# Altium PCB shield.PcbDoc
Units mm, origin at the board's own origin, x right, y up, seen from the top; angles counter-clockwise.
Board outline 86.11 x 99.08 mm, 4 copper layers (Top, AGND, POWER, Bottom), stack 0.699 mm thick; 35 components, 39 nets, 183 pads, 7 vias.
Unrouted connection lines stored in the file: 2.
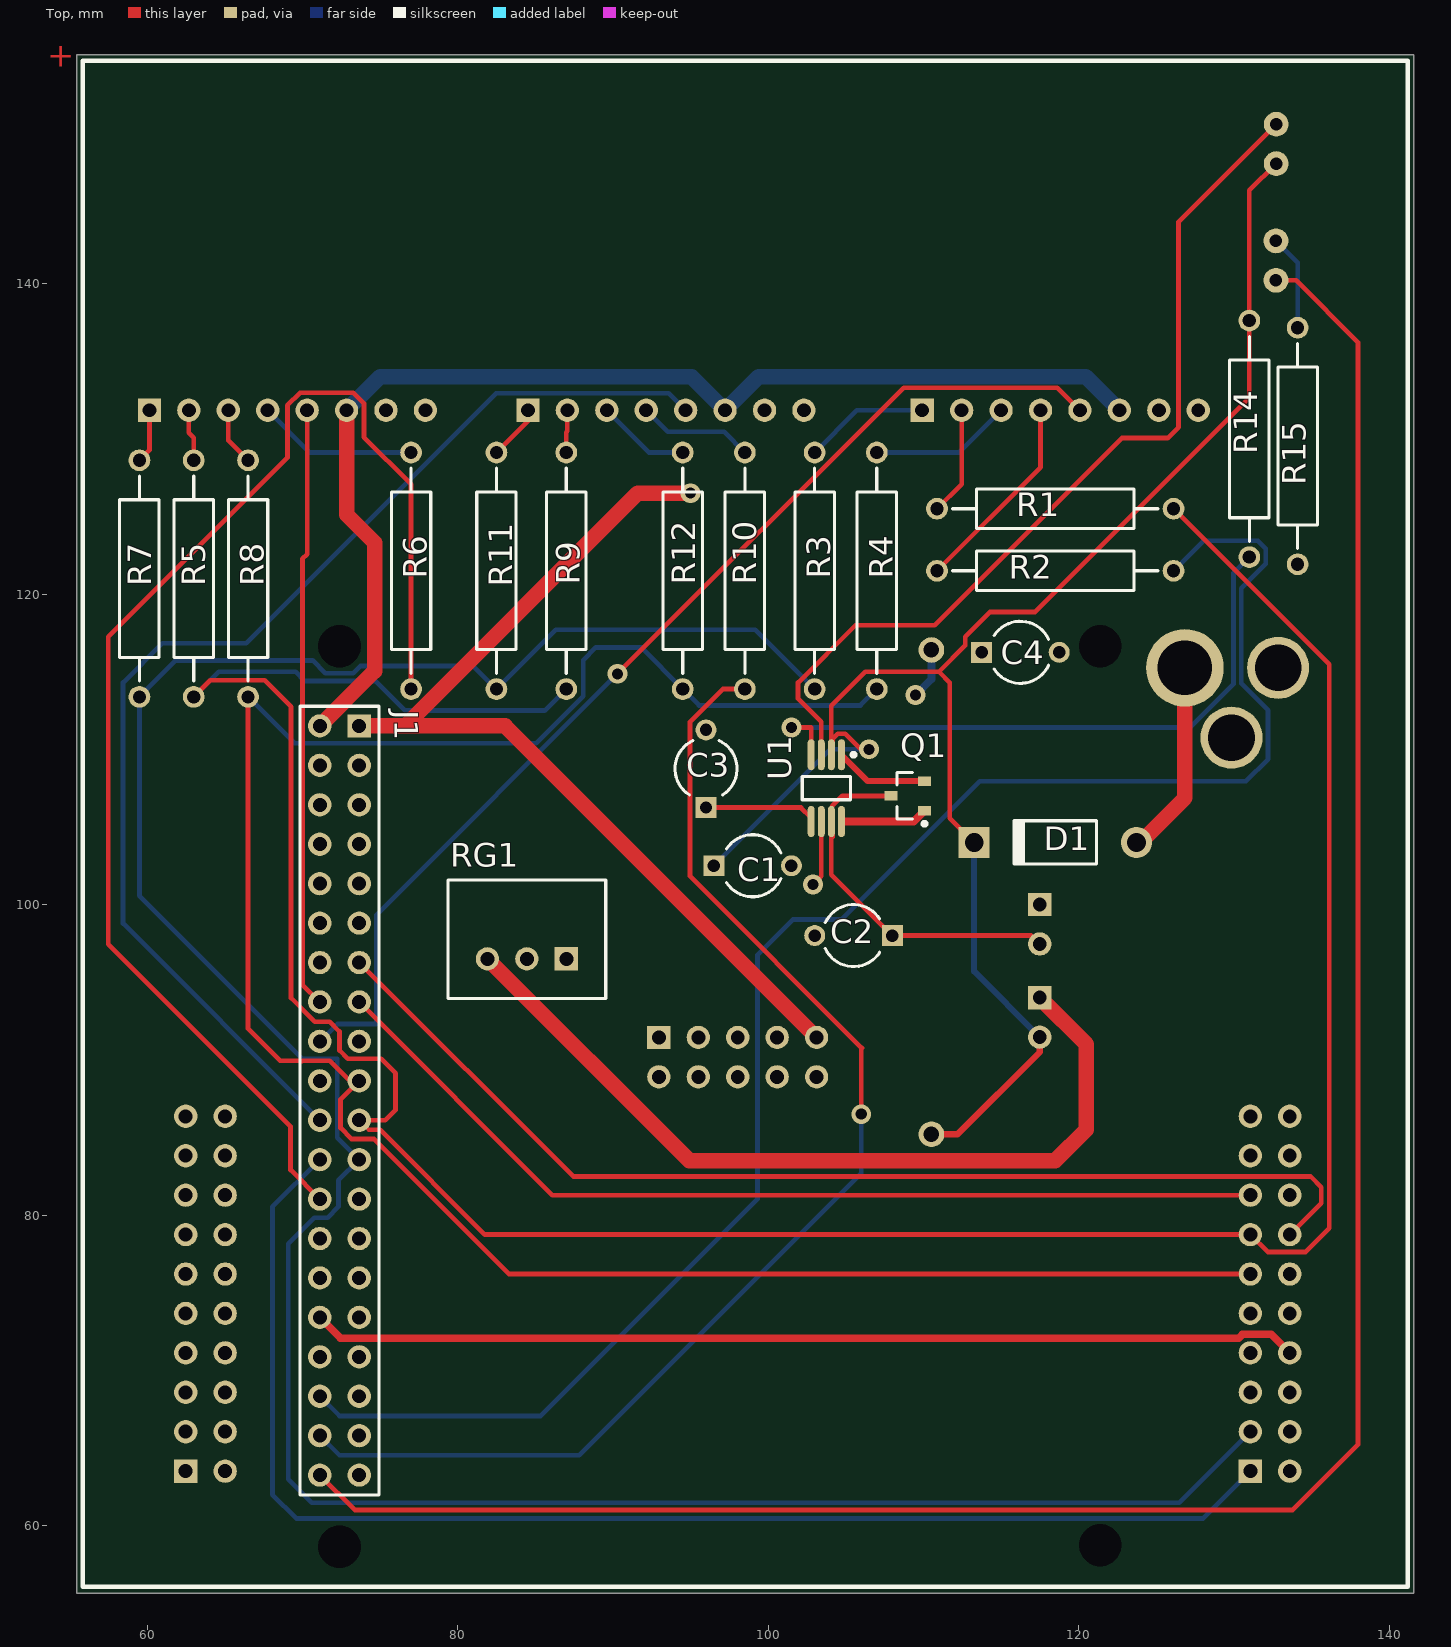
[diagram p0: Top view]
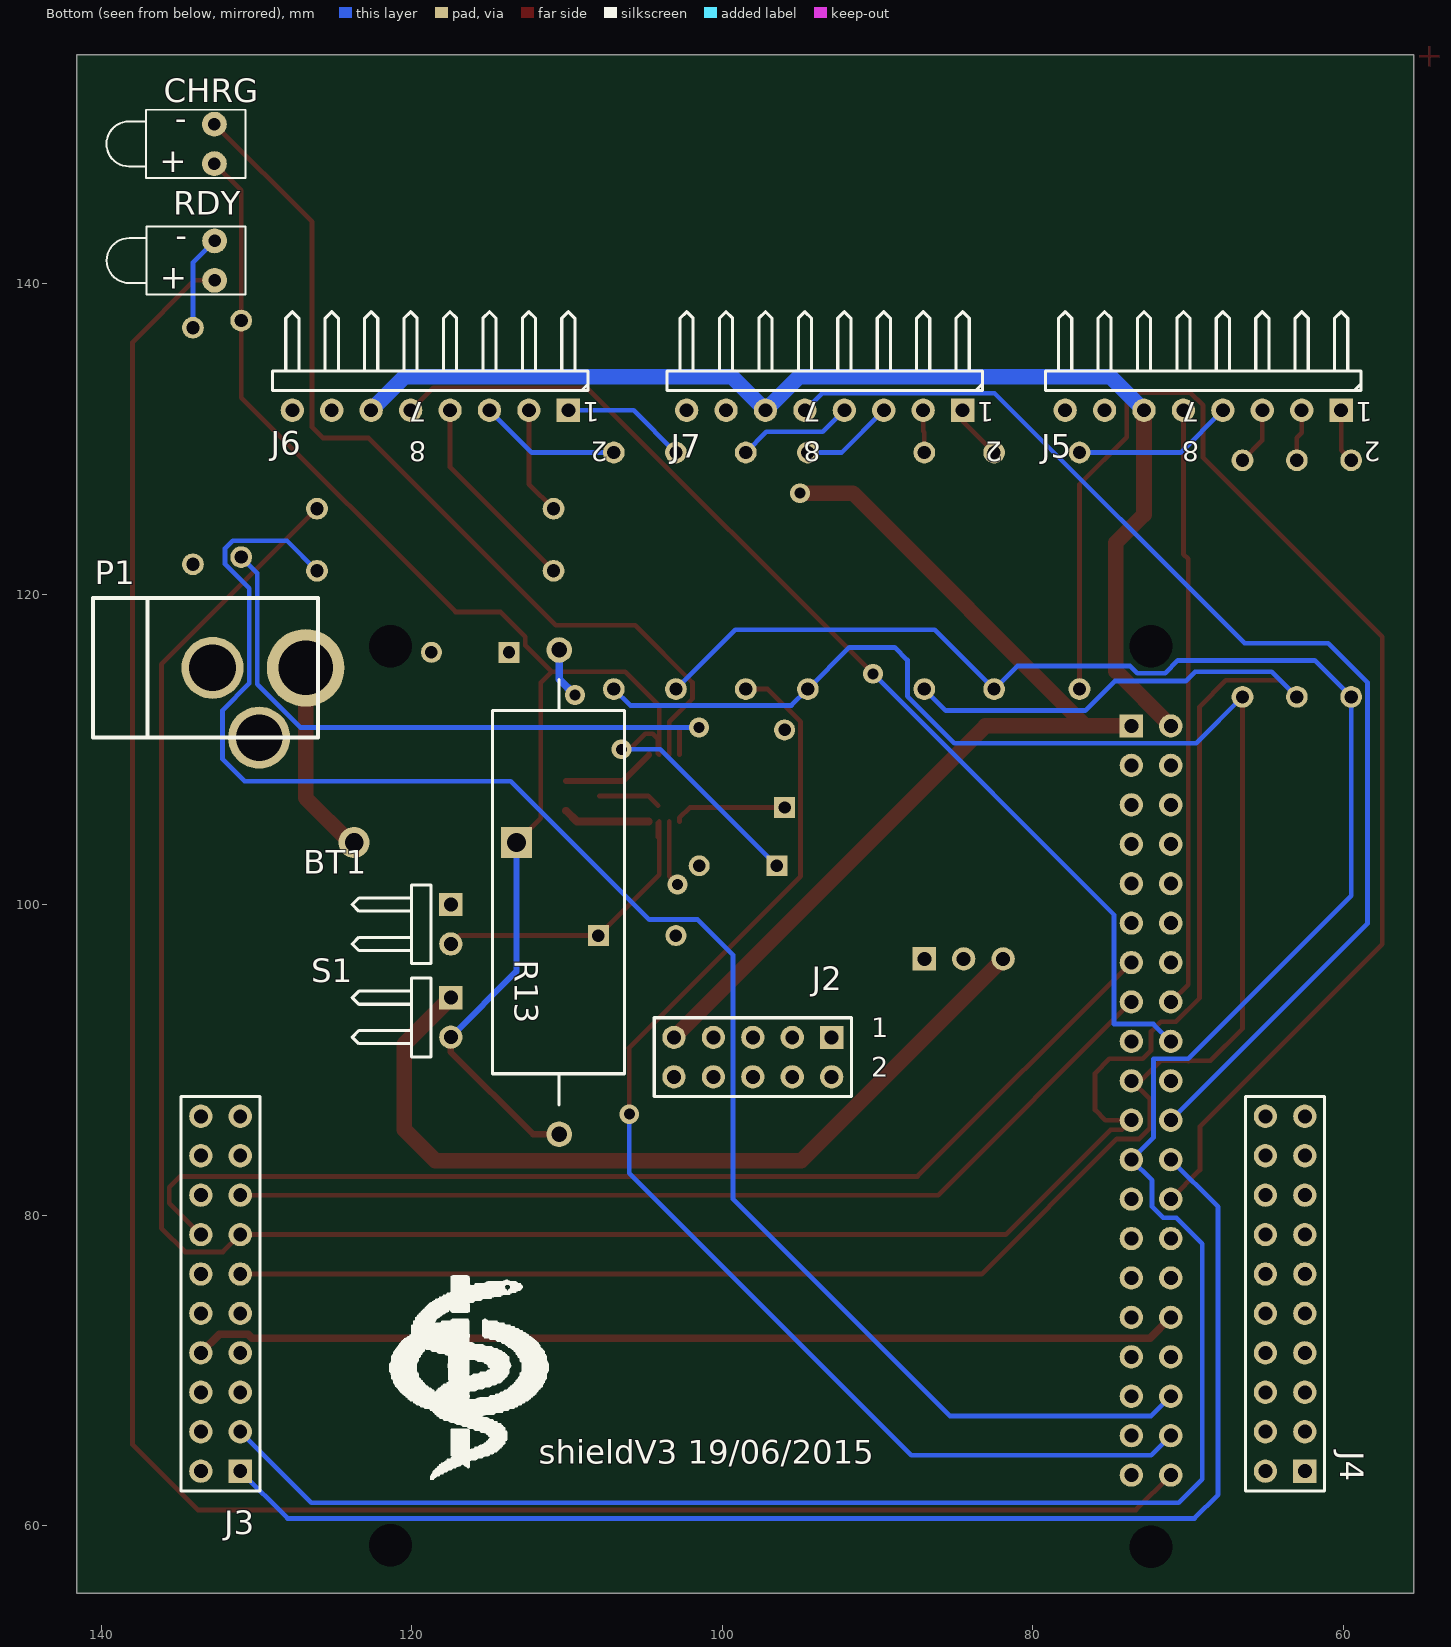
[diagram p1: Bottom view, seen from below]
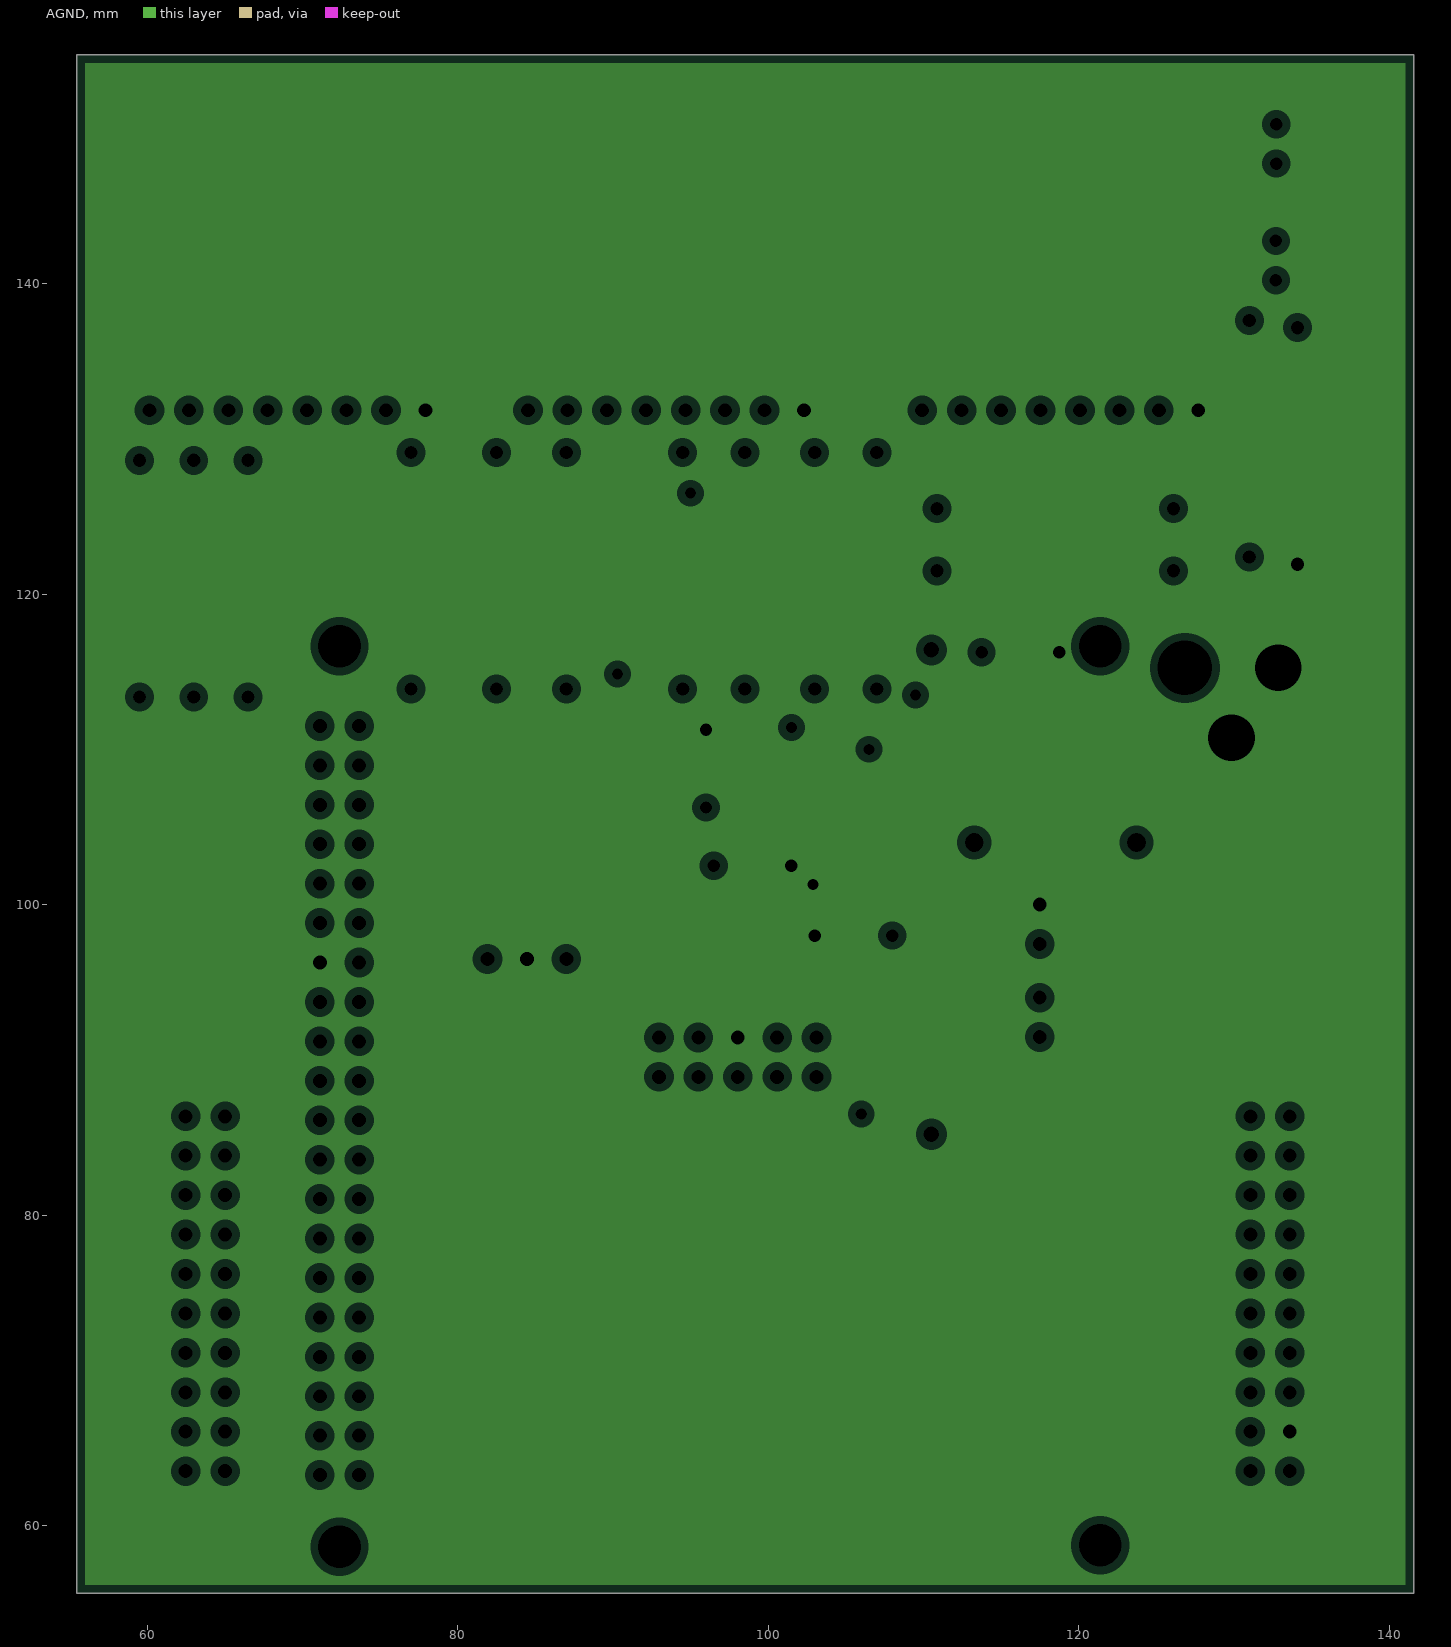
[diagram p2: AGND, clearances drawn from the general rule]
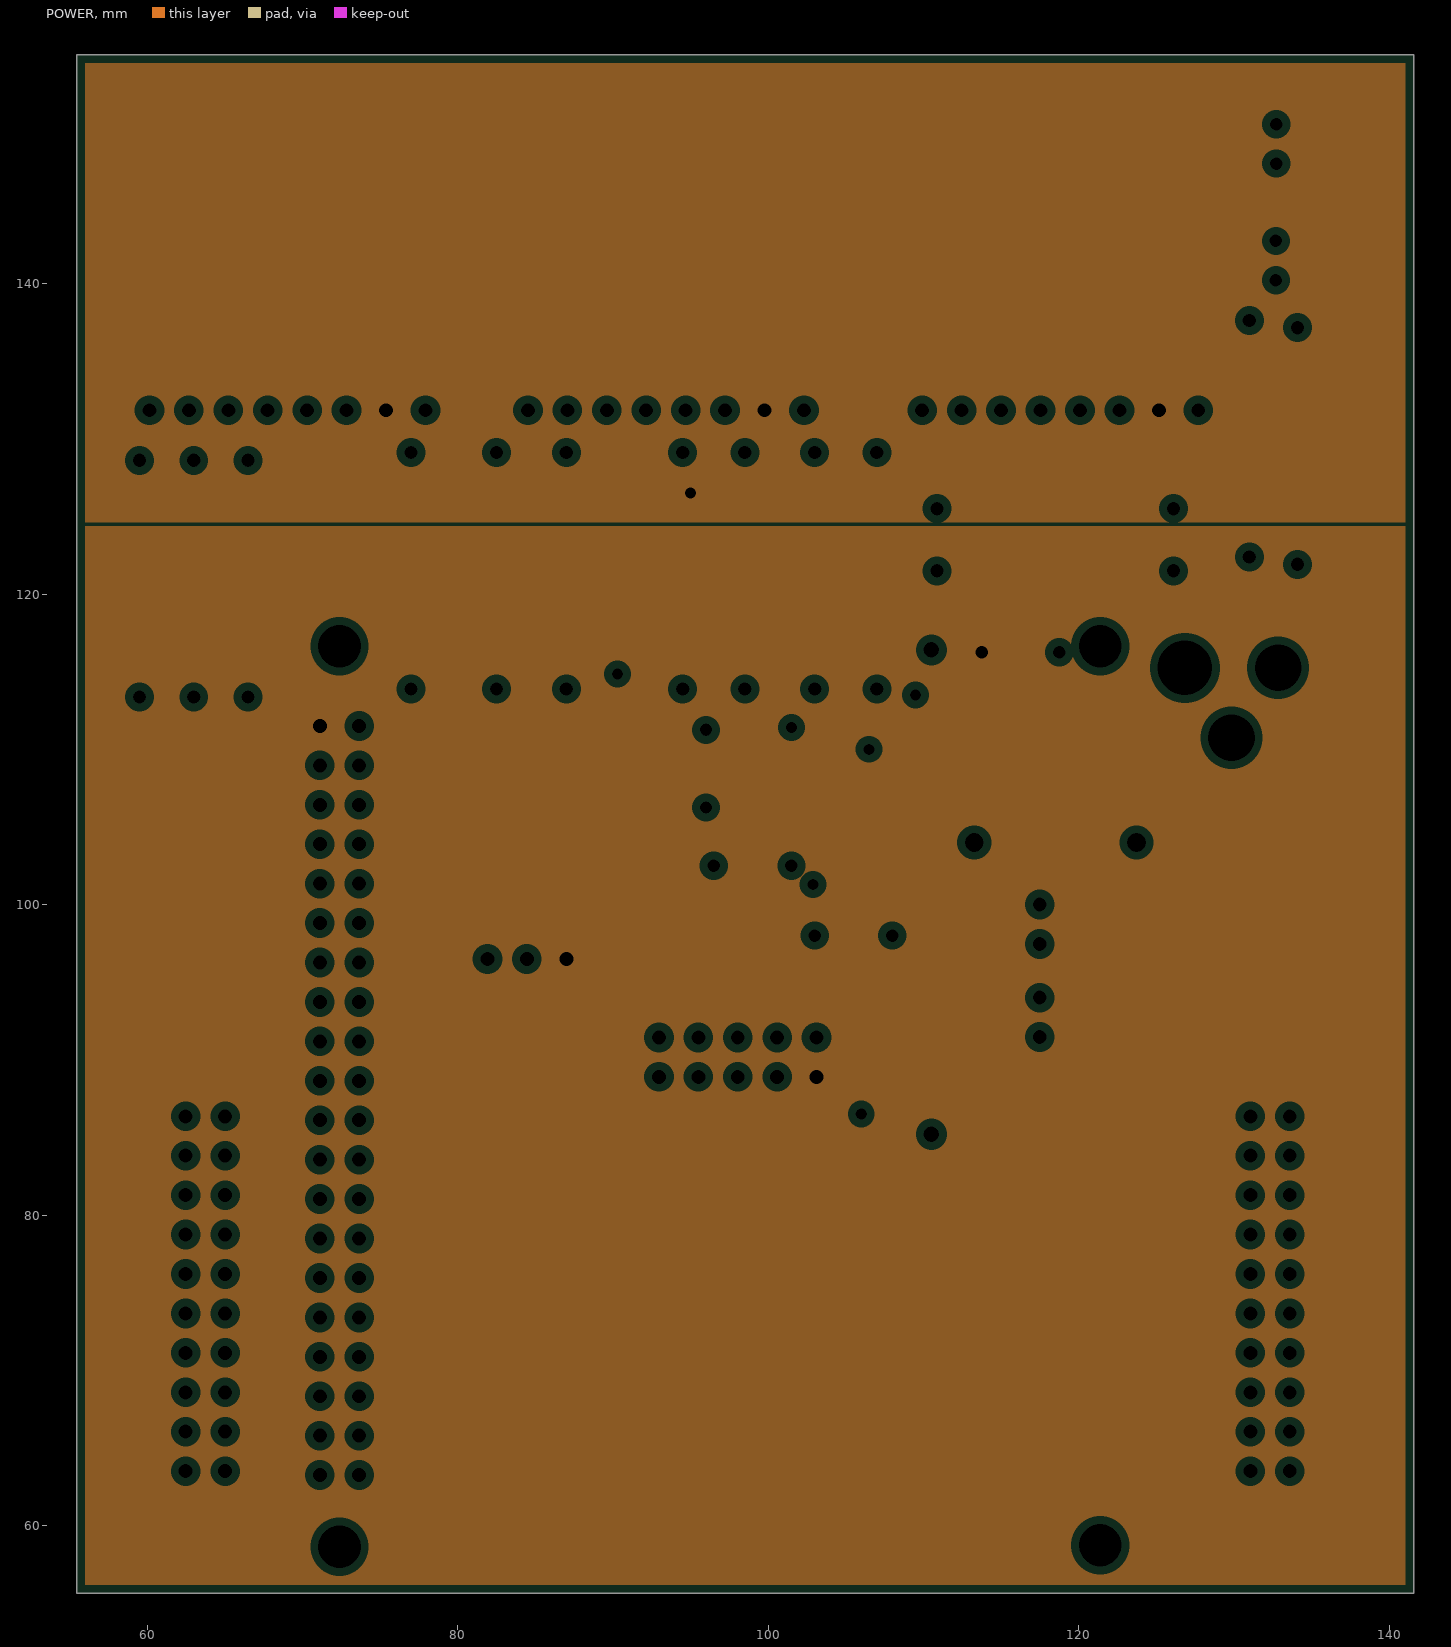
[diagram p3: POWER, clearances drawn from the general rule]

## Layer stack, top to bottom
Top Solder: solder mask 0.0102, Solder Resist, Dk 3.5
Top: signal copper 0.035
Dielectric 1: core 0.3, FR-4, Dk 4.8
AGND: plane copper 0.036, net AGND
Dielectric 2: prepreg 0.13, Dk 4.2
POWER: plane copper 0.036, net VDD
Dielectric 4: prepreg 0.127, Dk 4.2
Bottom: signal copper 0.035
Bottom Solder: solder mask 0.0102, Solder Resist, Dk 3.5

## Board outline
55.477,154.73 55.477,55.648 141.583,55.648 141.583,154.73

## Design rules (kind name [scope] priority, off if disabled: settings)
Clearance mdViaVia [IsVia vs IsVia] p1: gap=0.2
Clearance mdPadVia [IsPad vs IsVia] p2: gap=0.2
Clearance mdPadPad [IsPad vs IsPad] p3: gap=0.2
Clearance mdWireVia [(InLayerClass('Signal Layers') AND IsTrack) vs IsVia] p4: gap=0.2
Clearance mdWirePad [(InLayerClass('Signal Layers') AND IsTrack) vs IsPad] p5: gap=0.2
Clearance mdWireWire [(InLayerClass('Signal Layers') AND IsTrack) vs (InLayerClass('Signal Layers') AND IsTrack)] p6: gap=0.2
Clearance [All] p7: gap=0.381
HoleSize [All] p1: absolutevalues=TRUE maxlimit=2540 minlimit=0.381 maxpercent=80.000 minpercent=20.000
HoleToHoleClearance [All] p1: gap=0.203 allowstackedmicrovias=TRUE
MinimumSolderMaskSliver [All] p1: minsoldermaskwidth=0.031
PlaneClearance [All] p1: clearance=0.508
PlaneConnect [All] p1: planeconnectstyle=Relief reliefexpansion=0.508 reliefentries=4 reliefconductorwidth=0.254 reliefairgap=0.254
PolygonConnect ThermalVias [IsVia] p1: connectstyle=Direct reliefconductorwidth=0.254 reliefentries=4 polygonreliefangle="90 Angle" airgapwidth=0.254
PolygonConnect [All] p2: connectstyle=Relief reliefconductorwidth=0.254 reliefentries=4 polygonreliefangle="90 Angle" airgapwidth=0.254
RoutingVias [All] p1: holewidth=0.711 width=1.27 viastyle="Through Hole" minholewidth=0.711 minwidth=1.27 maxholewidth=0.711 maxwidth=1.27
SMDNeckDown [All] p1: percent=90.000
SilkToSilkClearance [All] p1 off: silktosilkclearance=0.254
SilkToSolderMaskClearance [IsPad] p1 off: minsilkscreentomaskgap=0.254 clearancetoexposedcopper=TRUE
SolderMaskExpansion [All] p1: expansion=0.075
Width [All] p1: maxlimit=2540 minlimit=0.305 preferedwidth=0.305 minimp=50.000000 maximp=50.000000 favimp=50.000000
23 further rules are at their usual default settings.

## Components (designator, comment, footprint, x,y, rotation, side; value= is the part's Value field where it differs from the comment)
BT1 "Battery" HDR1X2H 117.5,100 r270 bottom
C1 "Comment" CAPR5-4X5 99,102.5 r0 top
C2 "Comment" CAPR5-4X5 105.5,98 r180 top
C3 "Comment" CAPR5-4X5 96,108.75 r90 top
C4 "Comment" CAPR5-4X5 116.25,116.25 r0 top
CHRG "LED1" LED-1 132.73,149 r0 bottom
D1 "1N5817" DO-41 118.5,104 r180 top
J1 "RPi header" HDR2X20 73.66,111.506 r270 top locked
J2 "ADS1298 power" HDR2X5 92.964,91.44 r0 bottom locked
J3 "ADS1298 main header" HDR2X10 131.064,63.5 r90 bottom locked
J4 "ADS1298 dummy header" HDR2X10 62.484,63.5 r90 bottom locked
J5 "SPI module 0" HDR1X8H 60.145,131.843 r0 bottom
J6 "SPI module 1" HDR1X8H 109.929,131.843 r0 bottom
J7 "SPI module 2" HDR1X8H 84.529,131.843 r0 bottom
P1 "RAPC712X" DCjack 131.75,103.75 r270 bottom
Q1 "IRLML2244TRPbF" SOT-23_L 109,107 r180 top
R1 "Comment" AXIAL-0.6 118.5,125.5 r180 top
R2 "Comment" AXIAL-0.6 118.5,121.5 r180 top
R3 "Comment" AXIAL-0.6 103,121.5 r270 top
R4 "Comment" AXIAL-0.6 107,121.5 r270 top
R5 "Comment" AXIAL-0.6 63,121 r90 top
R6 "Comment" AXIAL-0.6 77,121.5 r90 top
R7 "Comment" AXIAL-0.6 59.5,121 r270 top
R8 "Comment" AXIAL-0.6 66.5,121 r270 top
R9 "Comment" AXIAL-0.6 87,121.5 r90 top
R10 "Comment" AXIAL-0.6 98.5,121.5 r90 top
R11 "Comment" AXIAL-0.6 82.5,121.5 r270 top
R12 "Comment" AXIAL-0.6 94.5,121.5 r270 top
R13 "Comment" AXIAL-1.0 110.52,101 r270 bottom
R14 "Comment" AXIAL-0.6 131,130 r90 top
R15 "Comment" AXIAL-0.6 134.112,129.54 r90 top
RDY "LED1" LED-1 132.715,141.485 r0 bottom
RG1 "TSRN1-2450" TSRN1-2450 87,96.5 r180 top
S1 "SW-SPST" HDR1X2H 117.5,94 r270 bottom
U1 "MCP73844" MSOP-8 103.75,107.5 r270 top

## Footprints (in the part's own frame and the unit in brackets; to place one, negate y for a bottom-side part, rotate by r counter-clockwise, add the part's x,y. Pads: shape width x height; smd on the part's side, far side on the other; paste and mask are expansions set on the pad)
AXIAL-0.6 [mm] "Axial Device, Thru-Hole; 2 Leads; 0.6 in Pin Spacing"
  round 1.4 hole 0.85: 1(-7.62,0) 2(7.62,0)
  silkscreen extent -6.6,-1.27 6.6,1.27
AXIAL-1.0 [mm] "Axial Device, Thru-Hole; 2 Leads; 1.0 in Pin Spacing"
  round 1.65 hole 1: 1(-15.4,0) 2(15.8,0)
  silkscreen extent -13.49,-4.3 13.89,4.2
CAPR5-4X5 [mm]
  rect 1.35x1.35 hole 0.8: 1(-2.5,0)
  round 1.35 hole 0.8: 2(2.5,0)
  silkscreen extent -1.69,-2 1.82,2
DCjack [mm]
  round 4 hole 3: GND1(-7,1.9) GND2(-11.5,-1.1)
  round 5 hole 3.5: V+(-11.5,4.9)
  silkscreen extent -16,-8.8 -7,5.7
DO-41 [mm] "Diode, Axial; Body 5.2 x 2.7 mm (LxDia. max), Lead Dia. 0.86 mm (max)"
  round 2 hole 1.2: 1(-5.23,0)
  rect 2x2 hole 1.2: 2(5.23,0)
  silkscreen extent -2.65,-1.4 2.75,1.4
HDR1X2H [mm] "Connector; Header; 2 Position; Right Angle"
  rect 1.5x1.5 hole 0.9: 1(0,0)
  round 1.5 hole 0.9: 2(2.54,0)
  silkscreen extent -1.27,-6.35 3.81,-1.27
HDR1X8H [mm]
  rect 1.5x1.5 hole 0.9: 1(0,0)
  round 1.5 hole 0.9: 2(2.54,0) 3(5.08,0) 4(7.62,0) 5(10.16,0) 6(12.7,0) 7(15.24,0) 8(17.78,0)
  silkscreen extent -1.27,-6.35 19.05,-1.27
HDR2X5 [mm]
  rect 1.5x1.5 hole 0.9: 1(0,0)
  round 1.5 hole 0.9: 2(0,2.54) 3(2.54,0) 4(2.54,2.54) 5(5.08,0) 6(5.08,2.54) 7(7.62,0) 8(7.62,2.54) 9(10.16,0) 10(10.16,2.54)
  silkscreen extent -1.27,-1.27 11.43,3.81
HDR2X10 [mm]
  rect 1.5x1.5 hole 0.9: 1(0,0)
  round 1.5 hole 0.9: 2(0,2.54) 3(2.54,0) 4(2.54,2.54) 5(5.08,0) 6(5.08,2.54) 7(7.62,0) 8(7.62,2.54) 9(10.16,0) 10(10.16,2.54) 11(12.7,0) 12(12.7,2.54) 13(15.24,0) 14(15.24,2.54) 15(17.78,0) 16(17.78,2.54) 17(20.32,0) 18(20.32,2.54) 19(22.86,0) 20(22.86,2.54)
  silkscreen extent -1.27,-1.27 24.13,3.81
HDR2X20 [mm]
  rect 1.5x1.5 hole 0.9: 1(0,0)
  round 1.5 hole 0.9: 2(0,-2.54) 3(2.54,0) 4(2.54,-2.54) 5(5.08,0) 6(5.08,-2.54) 7(7.62,0) 8(7.62,-2.54) 9(10.16,0) 10(10.16,-2.54) 11(12.7,0) 12(12.7,-2.54) 13(15.24,0) 14(15.24,-2.54) 15(17.78,0) 16(17.78,-2.54) 17(20.32,0) 18(20.32,-2.54) 19(22.86,0) 20(22.86,-2.54) 21(25.4,0) 22(25.4,-2.54) 23(27.94,0) 24(27.94,-2.54) 25(30.48,0) 26(30.48,-2.54) 27(33.02,0) 28(33.02,-2.54) 29(35.56,0) 30(35.56,-2.54) 31(38.1,0) 32(38.1,-2.54) 33(40.64,0) 34(40.64,-2.54) 35(43.18,0) 36(43.18,-2.54) 37(45.72,0) 38(45.72,-2.54) 39(48.26,0) 40(48.26,-2.54)
  silkscreen extent -1.27,-3.81 49.53,1.27
LED-1 [mm] "LED; 2 Leads"
  round 1.6 hole 0.8: 1(0,1.27) 2(0,-1.27)
  silkscreen extent -2,-2.2 6.95,2.2
MSOP-8 [mm] "TSOP, 8-Leads, Body 3x3mm, Pitch 0.65mm, IPC Low Density"
  oval 2x0.45 smd: 1(-2.15,0.975) 2(-2.15,0.325) 3(-2.15,-0.325) 4(-2.15,-0.975) 5(2.15,-0.975) 6(2.15,-0.325) 7(2.15,0.325) 8(2.15,0.975)
  silkscreen extent -2.27,-1.55 0.75,1.88, body extent -1.55,-1.55 1.55,1.55, height 1.1
SOT-23_L [mm] "SOT23, 3-Leads, Body 2.9x1.3mm, Pitch 0.95mm, Lead Span 2.5mm, IPC High Density"
  rect 0.85x0.6 smd: 1(-1.075,0.95) 2(-1.075,-0.95) 3(1.075,0)
  silkscreen extent -1.2,-1.5 0.7,1.92, body extent -0.7,-1.5 0.7,1.5, height 1.1
TSRN1-2450 [mm]
  round 1.5 hole 0.9: 1(5.08,0) 2(2.54,0)
  rect 1.5x1.5 hole 0.9: 3(0,0)
  silkscreen extent -2.54,-5.08 7.62,2.54

## Part data
BT1: "Multicell Battery"
C1: library part "Cap Pol1", "Polarized Capacitor (Radial)"
C2 C3 C4: library part Cap, "Capacitor"
CHRG RDY: "Typical RED GaAs LED"
D1: library part "Diode 1N4001", "1 Amp General Purpose Rectifier"
J1: library part "Header 20X2", "Header, 20-Pin, Dual row"
J2: library part "Header 5X2", "Header, 5-Pin, Dual row"
J3 J4: library part "Header 10X2", "Header, 10-Pin, Dual row"
J5 J6 J7: library part "Header 4X2", "Header, 4-Pin, Dual row"
P1: library part DCjack, "Header, 3-Pin"
Q1: "power MOSFET p"
R1 R2 R3 R4 R5 R6 R7 R8 R9 R10 R11 R12 R14 R15: library part Res2, "Resistor"
R13: library part Rsense, "Resistor"
S1: "Single-Pole, Single-Throw Switch"
U1: library part MCP7384x, "Header, 4-Pin, Dual row"

## Free pads (board coordinates)
  round 1.524 hole 2.75: 0(72.39,58.63) 0(72.39,116.63) 0(121.39,58.718) 0(121.39,116.63)

## Via types
v1: diameter 1.27, hole 0.711, Top to Bottom, 7 vias

## Nets (pads, with @x,y where several pads share a name; then routed paths per layer and width w, separated by ;. In a path a pad name is that pad's centre, name@x,y a point inside that pad or via, vN(x,y) a via of type N, cw(c..) or ccw(c..) an arc to the next point about the centre after c; other vN are vias at no path point)
A0_IRQ: J1.16 J5.5 | length 38.7
  Top w0.305: J5.5 70.305,122.578 70.002,122.276 70.002,119.678 70.002,94.844 J1.16
A1_IRQ: J1.18 J6.5 | length 71.1
  Top w0.305: v1(90.297,114.859) 108.737,133.299 118.633,133.299 J6.5
  Bottom w0.305: J1.18 72.238,92.304 74.778,92.304 74.778,99.339 v1(90.297,114.859)
A2_IRQ: J1.22 J7.5 | length 77.9
  Bottom w0.305: J1.22 58.445,98.781 58.445,114.3 60.985,116.84 66.37,116.84 82.476,132.945 93.587,132.945 J7.5
ADS_DRDY: J1.15 J3.15 | length 62.6
  Top w0.305: J1.15 86.106,81.28 J3.15
ADS_RESET: J1.32 J3.8 | length 63.6
  Top w0.5: J1.32 72.46,72.066 130.308,72.066 130.566,72.323 132.401,72.323 J3.8
ADS_START: J1.13 J3.14 | length 71.9
  Top w0.305: J1.13 87.443,82.483 107.785,82.483 134.941,82.483 135.636,81.788 135.636,80.772 J3.14
GND: BT1.1 C1.2 C2.2 C3.2 C4.2 J1.14 J2.5 J3.4 J5.8 J6.8 J7.8 P1.GND1 P1.GND2 R15.1 RG1.2 U1.6 | length 4.3
  Top w0.305: v1(102.895,101.295) 102.895,101.304 103.425,101.834 103.425,103.988 U1.6
NetC1_1: C1.1 CHRG.1 D1.2 R13.2 R14.2 S1.2 U1.2 | length 107.8
  Top w0.305: v1(106.5,110) 105.967,110 104.964,111.002 104.486,111.002 104.148,110.664 104.148,109.723 U1.2 104.075,112.813 106.262,115 111.009,115 ; D1.2 111.709,105.561 111.709,114.3 111.009,115 ; CHRG.1 131,146 R14.2 131,132.651 117.196,118.847 114.3,118.847 112.7,117.246 112.7,116.691 111.009,115
  Top w0.4: R13.2 112.2,85.2 117.5,90.5 S1.2
  Bottom w0.305: C1.1 104,110 v1(106.5,110)
  Bottom w0.4: D1.2 113.27,95.69 S1.2
NetC3_1: C3.1 U1.5 | length 7.3
  Top w0.305: C3.1 102.113,106.25 102.775,105.588 U1.5
NetCHRG_2: CHRG.2 U1.3 | length 58.7
  Top w0.305: U1.3 103.425,111.76 101.93,113.255 101.93,114.3 105.63,118 110.736,118 122.784,130.048 125.73,130.048 126.441,130.759 126.441,143.981 CHRG.2
NetD1_1: D1.1 P1.V+ | length 12.7
  Top w1: D1.1 123.98,104 126.85,106.87 P1.V+
NetJ1_36: J1.36 R2.1 | length 110.2
  Bottom w0.305: J1.36 72.39,67.056 85.344,67.056 99.314,81.026 99.314,96.749 101.6,99.035 104.724,99.035 113.64,107.95 130.785,107.95 132.207,109.372 132.207,112.52 130.48,114.247 130.48,120.371 132.052,121.944 132.052,122.934 131.554,123.432 128.052,123.432 R2.1
NetJ1_38: J1.38 R10.1 | length 81
  Top w0.305: R10.1 97.091,113.88 94.971,111.76 94.971,101.829 106.045,90.754 106,90.709 v1(106,86.5)
  Bottom w0.305: J1.38 72.39,64.516 87.833,64.516 106,82.683 v1(106,86.5)
NetJ1_40: J1.40 RDY.1 | length 147.5
  Top w0.305: J1.40 73.366,61 133.796,61 138,65.204 138,136.23 134.015,140.215 RDY.1
NetJ5_1: J5.1 R7.1 | length 3.5
  Top w0.305: R7.1 60.145,129.265 J5.1
NetJ5_2: J5.2 R5.2 | length 3.4
  Top w0.305: J5.2 62.685,130.388 63,130.073 R5.2
NetJ5_3: J5.3 R8.1 | length 3.8
  Top w0.305: J5.3 65.225,129.895 R8.1
NetJ5_4: J5.4 R6.2 | length 10.4
  Bottom w0.305: J5.4 70.488,129.12 R6.2
NetJ6_1: J6.1 R3.1 | length 8.1
  Bottom w0.305: R3.1 105.723,131.843 J6.1
NetJ6_2: J6.2 R1.2 | length 7
  Top w0.305: R1.2 112.469,127.089 J6.2
NetJ6_3: J6.3 R4.1 | length 9.1
  Bottom w0.305: R4.1 112.286,129.12 J6.3
NetJ6_4: J6.4 R2.2 | length 13.1
  Top w0.305: R2.2 117.549,128.169 J6.4
NetJ7_1: J7.1 R11.1 | length 3.6
  Top w0.305: R11.1 84.529,131.149 J7.1
NetJ7_2: J7.2 R9.2 | length 2.8
  Top w0.305: R9.2 87,130.429 87.069,130.498 J7.2
NetJ7_3: J7.3 R12.1 | length 6
  Bottom w0.305: J7.3 92.332,129.12 R12.1
NetJ7_4: J7.4 R10.2 | length 7.5
  Bottom w0.305: J7.4 93.538,130.454 97.166,130.454 R10.2
NetQ1_1: Q1.1 U1.8 | length 8.9
  Top w0.5: U1.8@104.75,105.35 109.375,105.35 Q1.1
  Bottom w0.5: v1(109.5,113.5) 110.52,114.52 110.52,116.4
NetQ1_2: Q1.2 R13.1 U1.1 | length 6.1
  Top w0.4: U1.1 106.425,107.95 Q1.2
NetR14_1: R14.1 U1.4 | length 41.3
  Top w0.305: v1(101.505,111.404) 102.775,111.404 U1.4
  Bottom w0.305: v1(101.505,111.404) 127.177,111.404 129.975,114.202 129.975,121.355 R14.1
NetR15_2: R15.2 RDY.2 | length 6.2
  Bottom w0.305: RDY.2 134.112,141.358 R15.2
SPI0_CE0: J1.24 J3.1 | length 87.7
  Bottom w0.305: J1.24 68.072,80.518 68.072,61.976 69.596,60.452 128.016,60.452 J3.1
SPI0_CE1: J1.26 R6.1 | length 86.8
  Top w0.305: J1.26 69.24,82.906 69.24,85.7 57.5,97.44 57.5,117.241 69.037,128.778 69.037,132.156 69.85,132.969 73.278,132.969 73.965,132.282 73.965,130.099 77,127.064 R6.1
SPI0_MISO: J1.21 J3.13 R1.1 R5.1 R9.1 | length 183.2
  Top w0.305: R5.1 64.072,114.452 67.564,114.452 69.266,112.751 69.266,93.98 70.79,92.456 71.755,92.456 72.39,91.821 72.39,90.602 72.923,90.068 75.068,90.068 76,89.137 76,86.77 75.336,86.106 J1.21 ; 74.266,85.5 75,85.5 81.76,78.74 J3.13 132.182,77.622 134.62,77.622 136.144,79.146 136.144,115.476 R1.1
  Bottom w0.305: R5.1 64.62,115 69.556,115 70.158,114.398 74.731,114.398 76.628,112.5 85.62,112.5 R9.1
SPI0_MOSI: J1.19 J3.11 R4.2 R8.2 R12.2 | length 143
  Top w0.305: R8.2 66.5,92 68.562,89.938 69.955,89.938 ; 69.972,89.921 69.955,89.938 ; J1.19@73.047,88.646 71.755,89.938 69.955,89.938 ; J1.19 72.457,87.443 72.457,85.608 73.162,84.903 74.609,84.903 83.312,76.2 J3.11
  Bottom w0.305: R8.2 69.492,110.388 85.065,110.388 88.087,113.411 88.087,115.748 88.9,116.561 91.819,116.561 R12.2 95.553,112.827 105.947,112.827 R4.2
SPI0_SCLK: J1.23 J3.3 R3.2 R7.2 R11.2 | length 173.2
  Bottom w0.305: R3.2 99.176,117.704 86.324,117.704 R11.2 81.013,115.367 73.736,115.367 73.272,114.903 71.483,114.903 70.663,115.722 61.842,115.722 R7.2 59.5,100.571 70.002,90.068 72.238,90.068 72.238,84.988 J1.23 72.323,82.229 72.323,80.528 71.618,79.823 70.755,79.823 69.088,78.156 69.088,62.992 70.612,61.468 126.492,61.468 J3.3
VCC: J1.1 J2.9 J5.7 J6.7 J7.7 | length 62.4
  Top w1: J1.1 76.606,111.506 ; v1(95,126.5) 91.6,126.5 76.606,111.506 ; J2.9 83.058,111.506 76.606,111.506
VDD: C4.1 J1.2 J2.10 J5.6 J6.6 J7.6 RG1.3 | length 75.9
  Top w1: J1.2 74.651,115.037 74.651,123.317 72.845,125.123 J5.6
  Bottom w1: J5.6 75.002,134 95.072,134 J7.6 99.386,134 120.472,134 J6.6
VIN: RG1.1 S1.1 | length 54.5
  Top w1: RG1.1 94.92,83.5 118.5,83.5 120.5,85.5 120.5,91 S1.1
VIN_BATT: BT1.2 C2.1 Q1.3 U1.7 | length 23.8
  Top w0.305: 104.148,104.336 104.148,105.277 U1.7 104.075,101.925 C2.1 116.96,98 BT1.2 ; 104.148,106.364 104.783,107 Q1.3
pads on no net: J1.3 J1.4 J1.5 J1.6 J1.7 J1.8 J1.9 J1.10 J1.11 J1.12 J1.17 J1.20 J1.25 J1.27 J1.28 J1.29 J1.30 J1.31 J1.33 J1.34 J1.35 J1.37 J1.39 J2.1 J2.2 J2.3 J2.4 J2.6 J2.7 J2.8 J3.2 J3.5 J3.6 J3.7 J3.9 J3.10 J3.12 J3.16 J3.17 J3.18 J3.19 J3.20 J4.1 J4.2 J4.3 J4.4 J4.5 J4.6 J4.7 J4.8 J4.9 J4.10 J4.11 J4.12 J4.13 J4.14 J4.15 J4.16 J4.17 J4.18 J4.19 J4.20

## Polygon pours and split planes (outlines as drawn)
GND on AGND (split plane): 141.073,56.158 55.987,56.158 55.987,154.22 141.073,154.22
VCC on POWER (split plane): 141.073,124.629 55.987,124.629 55.987,154.22 141.073,154.22
VDD on POWER (split plane): 141.073,56.158 55.987,56.158 55.987,124.371 141.073,124.371

## Other copper
Top:
  text "+" at 53.572,153.968 h1.52
POWER (plane layer: these items are gaps in the copper):
  lines w0.254: 55.477,124.5 141.583,124.5

## Silkscreen, mask and mechanical layers (free items; w line width, h text height)
Top Overlay:
  lines w0.305: 55.858,56.051 55.858,154.349 141.202,154.349 141.202,56.051 55.858,56.051
Bottom Overlay:
  drawing of 980 lines, arcs and shapes, not listed
  text "shieldV3 19/06/2015" at 111.828,63.981 h1.52

## Text inside footprints (layer, text, board x,y; h text height)
CHRG: Bottom Overlay "-" at 134.508,151.032 h1.52 r180; Bottom Overlay "+" at 134.508,148.492 h1.52 r180
J2: Bottom Overlay "1" at 90.424,91.44 h1.27; Bottom Overlay "2" at 90.424,88.9 h1.27
J5: Bottom Overlay "2" at 57.605,129.811 h1.27 r180; Bottom Overlay "1" at 58.113,132.351 h1.27 r180; Bottom Overlay "7" at 69.289,132.351 h1.27 r180; Bottom Overlay "8" at 69.289,129.811 h1.27 r180
J6: Bottom Overlay "2" at 107.389,129.811 h1.27 r180; Bottom Overlay "1" at 107.897,132.351 h1.27 r180; Bottom Overlay "7" at 119.073,132.351 h1.27 r180; Bottom Overlay "8" at 119.073,129.811 h1.27 r180
J7: Bottom Overlay "2" at 81.989,129.811 h1.27 r180; Bottom Overlay "1" at 82.497,132.351 h1.27 r180; Bottom Overlay "7" at 93.673,132.351 h1.27 r180; Bottom Overlay "8" at 93.673,129.811 h1.27 r180
RDY: Bottom Overlay "+" at 134.493,140.977 h1.52 r180; Bottom Overlay "-" at 134.493,143.517 h1.52 r180